# Allegro board CY8CKIT-038_Layout.brd
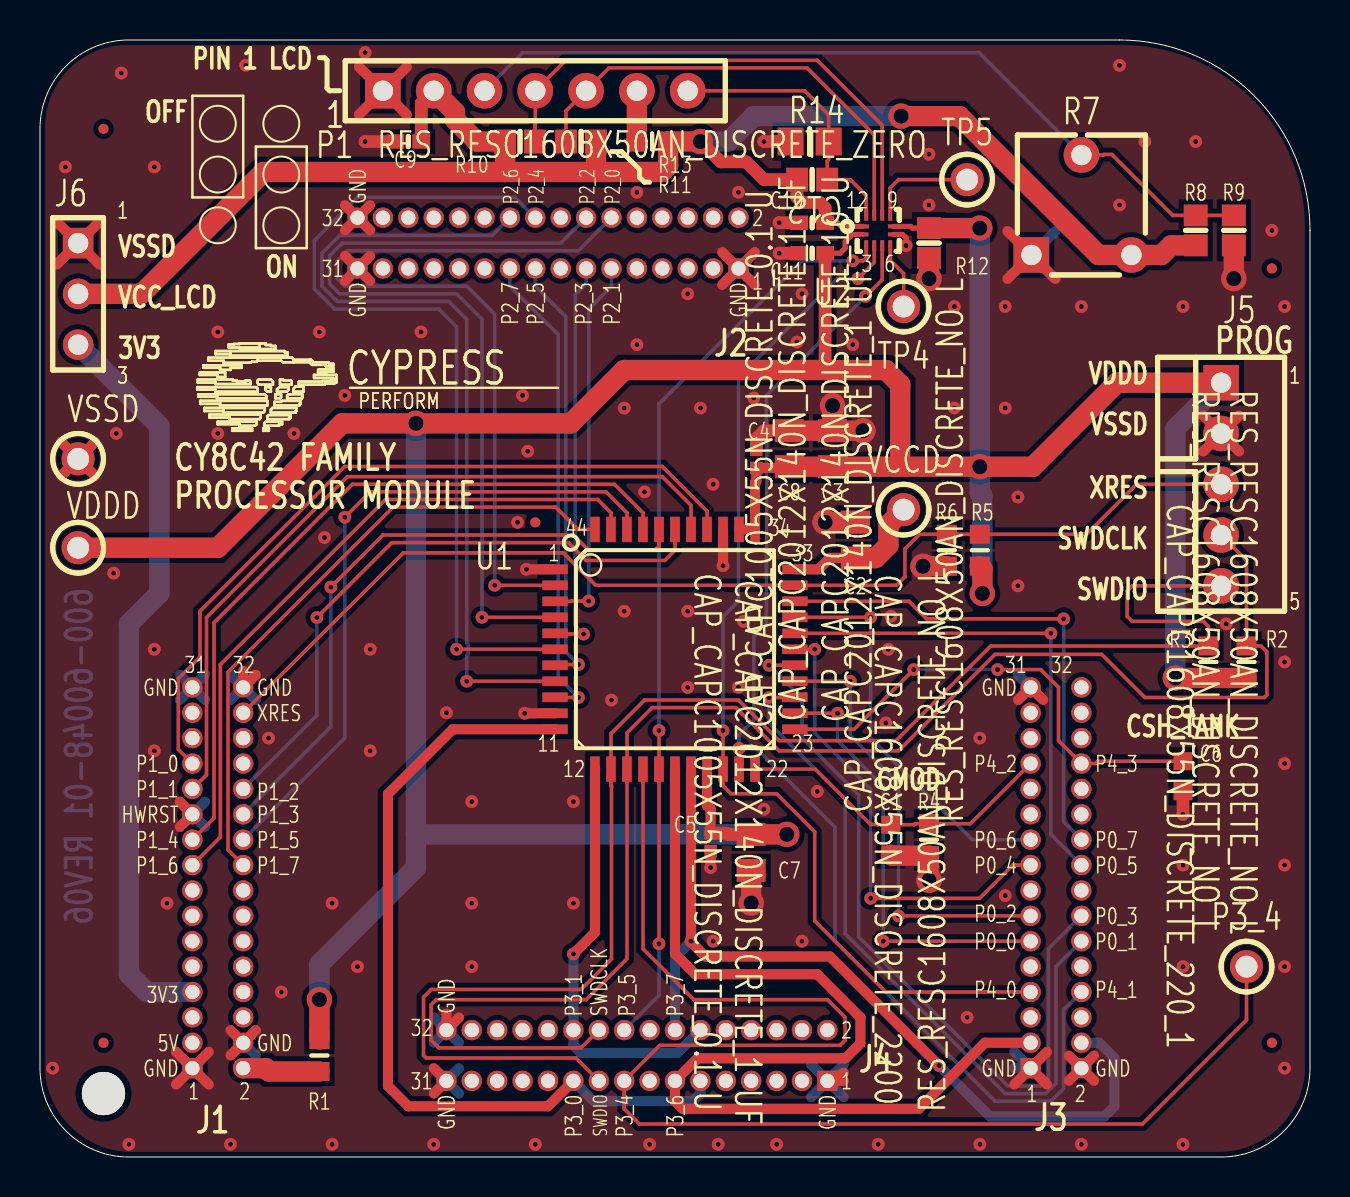
[diagram p0: board, top side]
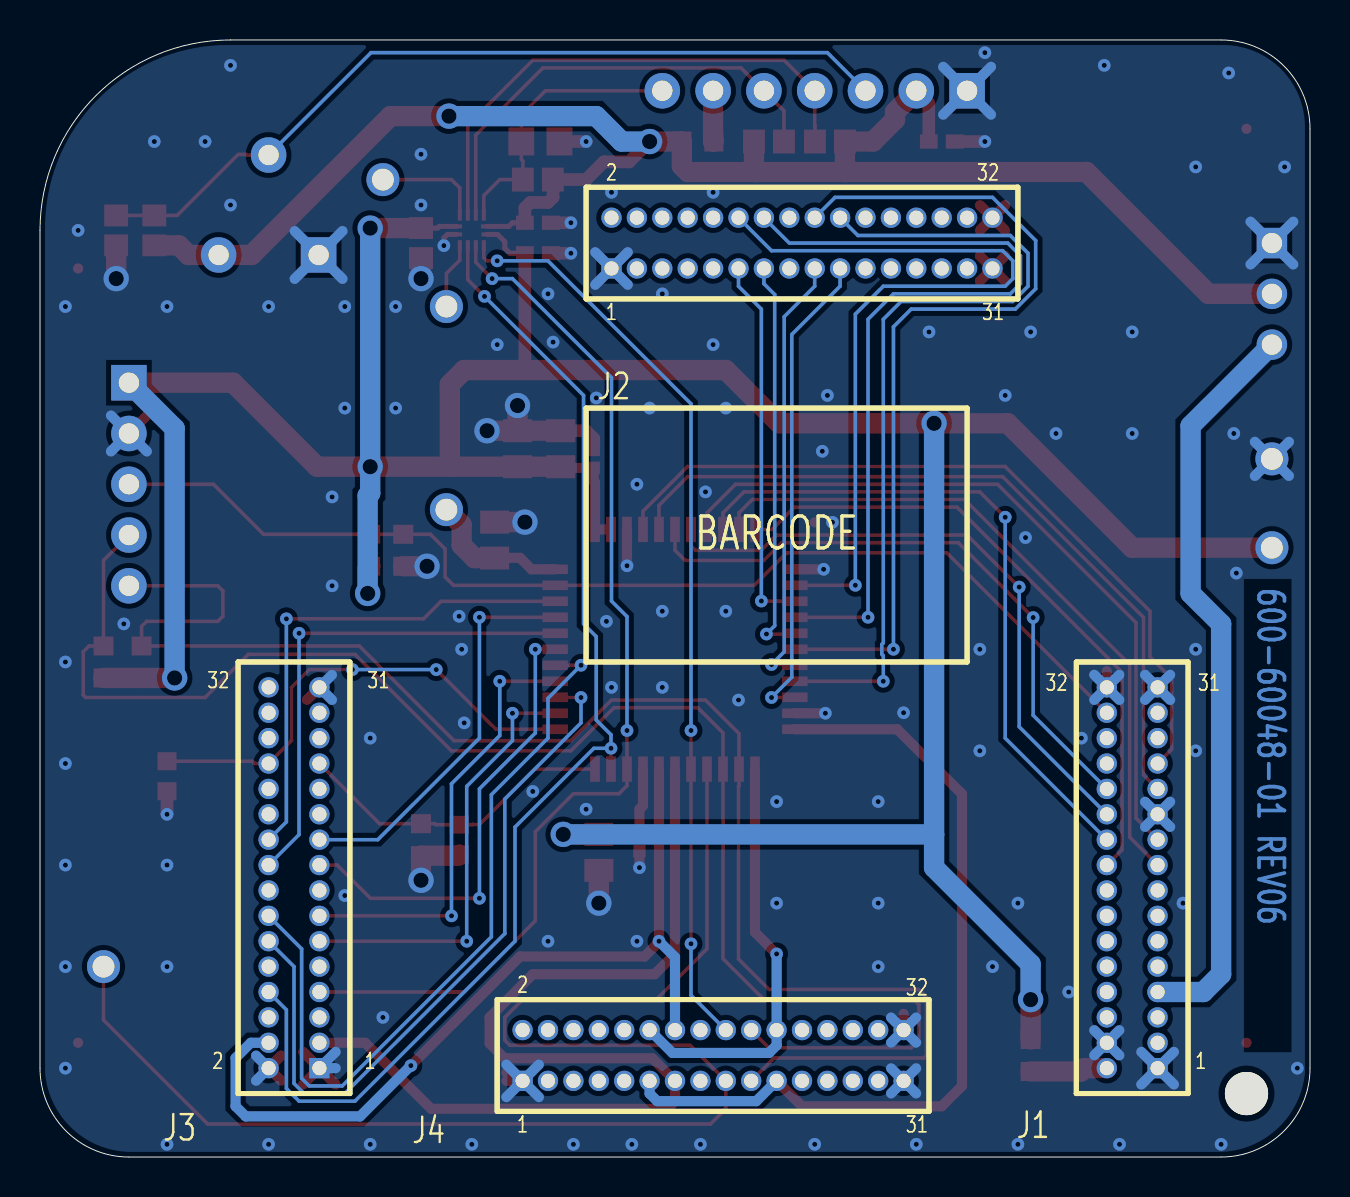
[diagram p1: board, bottom side, seen from below]

Outline 63.5 x 55.88 mm; copper layers: TOP, BOTTOM. Coordinates in mm from the lower left corner of the outline.

## Placement (name value [footprint] x y rotation side)
C1  2200 pF  [CAPC1608X55N]  42.54 15.88 270 top
C2  1 uF  [CAPC2012X140N]  40.77 30.86 90 top
C3  10 uF  [CAPC2012X140N]  39.62 35.43 90 top
C4  0.1 uF  [CAPC1005X55N]  35.81 34.92 90 top
C5  0.1 uF  [CAPC1005X55N]  33.53 15.75 270 top
C6  2200 pF  [CAPC1608X55N]  57.15 19.05 270 top
C7  1 uF  [CAPC2012X140N]  35.56 15.24 270 top
C8  1 uF  [CAPC2012X140N]  37.46 35.43 90 top
C9  0.1 uFd  [C-CC0402]  18.41 50.8 0 top
C10  0.1 uFd  [C-CC0402]  38.61 46.74 180 top
C11  0.1 uFd  [C-CC0402]  38.61 45.21 180 top
C12  22 uFd  [C-CC0603]  38.61 48.89 180 top
J1  Header 2x16  [HDR16X2-0P05]  8.89 13.97 270 bottom
J2  Header 2x16  [HDR16X2-0P05]  25.4 45.72 0 bottom
J3  Header 2x16  [HDR16X2-0P05]  50.8 13.97 270 bottom
J4  Header 2x16  [HDR16X2-0P05]  29.85 5.08 0 bottom
J5  HDR 1x5  [HDR5_KEYED_M]  59.05 28.57 90 top
J6  3 PIN HDR  [HDR3]  1.9 45.72 180 top
NOREF  -  []  236.77 23.18 0 top
NOREF#2  -  [unnamed#2]  3.17 3.17 0 top
NOREF#3  -  [unnamed#2]  24.77 31.75 0 top
NOREF#4  -  []  -128.65 -282.19 0 top
NOREF#5  -  []  3.17 3.17 0 top
NOREF#6  -  [unnamed#2]  61.59 44.45 0 top
NOREF#7  -  []  3.17 3.17 0 top
NOREF#8  -  []  0 4.45 0 top
NOREF#9  -  [unnamed#2]  61.59 5.71 0 top
NOREF#10  -  []  63.5 4.45 0 top
NOREF#11  -  []  303.15 -205.99 0 top
NOREF#12  -  [unnamed#2]  3.17 5.71 0 top
NOREF#13  -  []  4.45 0 0 top
NOREF#14  -  []  61.24 0.58 0 top
NOREF#15  -  []  10.79 36.2 0 top
NOREF#16  -  [unnamed#2]  3.17 51.43 0 top
NOREF#17  -  []  24.77 53.34 0 top
NOREF#18  -  []  4.45 55.88 0 top
NOREF#19  -  []  61.18 52.59 0 top
NOREF#20  -  []  303.15 -205.99 0 top
NOREF#21  -  []  -1.65 -205.99 180 bottom
NOREF#22  -  []  26.67 31.12 180 bottom
P1  LCD HEADER W/O BACKLIGHT  [LCD_SD1602X_CONN]  24.77 53.34 0 top
P3_4  RED  [TP_43_65]  60.32 9.52 0 top
R1  ZERO  [RESC1608X50AN]  13.97 5.08 90 top
R2  NO LOAD  [RESC1608X50AN]  60.32 24.77 270 top
R3  NO LOAD  [RESC1608X50AN]  58.42 24.77 270 top
R4  NO LOAD  [RESC1608X50AN]  44.45 15.88 90 top
R5  NO LOAD  [RESC1608X50AN]  46.99 30.35 270 top
R6  NO LOAD  [RESC1608X50AN]  45.34 30.35 90 top
R7  10K  [EVN-D8AA03B14]  52.07 47.62 0 top
R8  2.7K  [R-CR0603]  57.78 46.35 90 top
R9  7.15K  [R-CR0603]  59.69 46.35 270 top
R10  4.7K  [R-CR0603]  24 50.8 180 top
R11  4.7K  [R-CR0603]  27.05 50.8 0 top
R12  10K  [R-CR0603]  44.45 45.72 270 top
R13  ZERO  [RESC1608X50AN]  30.61 50.8 0 top
R14  10K  [R-CR0805]  38.48 50.8 0 top
TP4  RED  [TP_43_65]  43.18 42.54 0 top
TP5  RED  [TP_43_65]  46.35 48.89 0 top
U1  PSoC4A_44_TQFP  [TQFP44]  31.75 25.4 0 top
U2  FXMAR2104  [UMLP-12_2P10X2P10MM]  41.91 46.35 0 top
VCCD  RED  [TP_43_65]  43.18 32.38 0 top
VDDD  RED  [TP_43_65]  1.9 30.48 0 top
VSSD  BLACK  [TP_43_65]  1.9 34.92 0 top

## Library data of the parts
C1 = CAP: room: USB
C2 = CAP: alternate symbols: (CAPC2012X140N,CAPC2012X140L,CAPC2012X140M); room: USB
C3 C6-C8 = CAP: alternate symbols: (CAPC2012X140N,CAPC2012X140L,CAPC2012X140M)
C4 C5 = CAP: alternate symbols: (CAPC1005X55N,CAPC1005X55L,CAPC1005X55M)
C9-C11 = 0.1 uFd 0402: alternate symbols: (C-CC0402_A)
C12 = 1000 pFd 0603 NPO_0
J1 = HDR_2x16_SHRD: alternate symbols: (HDR16X2-0P05); room: USB
J2-J4 = HDR_2x16_SHRD: alternate symbols: (HDR16X2-0P05)
J5 = HDR 1x5 Keyed 0.1_M
J6 = 3 PIN Header GOLD_0
P1 = RCP LCD 16x1 _1.100 TH
P3_4 TP4 TP5 VCCD VDDD VSSD = TEST_POINT
R1 R13 = RES: alternate symbols: (RESC1608X50AN,RESC1608X50AL,RESC1608X50AM)
R2 R4 R5 = RES
R3 R6 = RES: room: USB
R7 = Pot 10K single turn 3352T
R8 = 2_0.4K ohm 5% 0603: alternate symbols: (R-CR0603_A)
R9 = 680 ohm 5% 0603_0: alternate symbols: (R-CR0603_A)
R10 R11 = 6_0.04K ohm 1% 0603: alternate symbols: (R-CR0603_A)
R12 = 10K ohm 5% 0603_0: alternate symbols: (R-CR0603_A)
R14 = 330 ohm 5% 0805_1
U1 = PSOC4A_44_TQFP_4: alternate symbols: (tqfpa100); room: USB
U2 = PSOC4A_44_TQFP_6: alternate symbols: (tqfpa100)

## Footprints (pads in the part's own frame, mm; a bottom-side part is the same pattern mirrored in y, then rotated)
C-CC0402
  rect 0.889x0.711 smd: 1(-0.648,0) 2(0.648,0)
C-CC0603
  rect 1.092x1.194 smd: 1(-0.749,0) 2(0.749,0)
CAPC1005X55N
  rect 0.62x0.62 smd: 1(-0.45,0) 2(0.45,0)
CAPC1608X55N
  rect 0.9x0.95 smd: 1(-0.75,0) 2(0.75,0)
CAPC2012X140N
  rect 1.15x1.45 smd: 1(-0.9,0) 2(0.9,0)
EVN-D8AA03B14
  rect 1.778x1.778 hole 1.016: 1(-2.5,-2.5)
  round 1.778 hole 1.016: 2(0,2.5) 3(2.5,-2.5)
HDR3
  rect 1.524x1.524 hole 1.016: 1(0,0)
  round 1.524 hole 1.016: 2(0,2.54) 3(0,5.08)
HDR5_KEYED_M
  rect 1.778x1.778 hole 1.016: 1(10.16,0)
  round 1.778 hole 1.016: 2(7.62,0) 3(5.08,0) 4(2.54,0) 5(0,0)
HDR16X2-0P05
  rect 1.016x1.016 hole 0.711: 1(9.525,1.27)
  round 1.016 hole 0.711: 2(9.525,-1.27) 3(8.255,1.27) 4(8.255,-1.27) 5(6.985,1.27) 6(6.985,-1.27) 7(5.715,1.27) 8(5.715,-1.27) 9(4.445,1.27) 10(4.445,-1.27) 11(3.175,1.27) 12(3.175,-1.27) 13(1.905,1.27) 14(1.905,-1.27) 15(0.635,1.27) 16(0.635,-1.27) 17(-0.635,1.27) 18(-0.635,-1.27) 19(-1.905,1.27) 20(-1.905,-1.27) 21(-3.175,1.27) 22(-3.175,-1.27) 23(-4.445,1.27) 24(-4.445,-1.27) 25(-5.715,1.27) 26(-5.715,-1.27) 27(-6.985,1.27) 28(-6.985,-1.27) 29(-8.255,1.27) 30(-8.255,-1.27) 31(-9.525,1.27) 32(-9.525,-1.27)
LCD_SD1602X_CONN
  rect 1.778x1.778 hole 1.016: 1(-7.62,0)
  round 1.778 hole 1.016: 2(-5.08,0) 3(-2.54,0) 4(0,0) 5(2.54,0) 6(5.08,0) 7(7.62,0)
R-CR0603
  rect 1.092x1.194 smd: 1(-0.749,0) 2(0.749,0)
R-CR0805
  rect 1.295x1.397 smd: 1(-0.953,0) 2(0.953,0)
RESC1608X50AN
  rect 0.95x1 smd: 1(-0.8,0) 2(0.8,0)
TP_43_65
  round 1.651 hole 1.092: 1(0,0)
TQFP44
  rect 1.27x0.483 smd: 1(-5.994,4) 2(-5.994,3.2) 3(-5.994,2.4) 4(-5.994,1.6) 5(-5.994,0.8) 6(-5.994,0) 7(-5.994,-0.8) 8(-5.994,-1.6) 9(-5.994,-2.4) 10(-5.994,-3.2) 11(-5.994,-4) 23(5.994,-4) 24(5.994,-3.2) 25(5.994,-2.4) 26(5.994,-1.6) 27(5.994,-0.8) 28(5.994,0) 29(5.994,0.8) 30(5.994,1.6) 31(5.994,2.4) 32(5.994,3.2) 33(5.994,4)
  rect 0.483x1.27 smd: 12(-4,-5.994) 13(-3.2,-5.994) 14(-2.4,-5.994) 15(-1.6,-5.994) 16(-0.8,-5.994) 17(0,-5.994) 18(0.8,-5.994) 19(1.6,-5.994) 20(2.4,-5.994) 21(3.2,-5.994) 22(4,-5.994) 34(4,5.994) 35(3.2,5.994) 36(2.4,5.994) 37(1.6,5.994) 38(0.8,5.994) 39(0,5.994) 40(-0.8,5.994) 41(-1.6,5.994) 42(-2.4,5.994) 43(-3.2,5.994) 44(-4,5.994)
UMLP-12_2P10X2P10MM
  rect 0.588x0.2 smd: 1(-0.756,0.2)
  rect 0.563x0.2 smd: 2(-0.769,-0.2) 7(0.769,-0.2) 8(0.769,0.2)
  rect 0.2x0.563 smd: 3(-0.6,-0.769) 4(-0.2,-0.769) 5(0.2,-0.769) 6(0.6,-0.769) 9(0.6,0.769) 10(0.2,0.769) 11(-0.2,0.769) 12(-0.6,0.769)
unnamed#2
  round 2.159 hole 2.286 unplated: (0,0)

## Nets
3V3: J1.7 J6.3
5V: J1.3
GND_SIGNAL: C1.2 C2.2 C3.2 C4.2 C5.2 C6.2 C7.2 C8.2 C9.1 C10.2 C11.2 J1.1 J1.4 J1.21 J1.31 J1.32 J2.1 J2.31 J2.32 J3.1 J3.2 J3.31 J4.1 J4.31 J4.32 J5.2 J6.1 P1.1(GND) R4.1 R6.1 R7.1 R9.2 R12.2 R14.1 U1.1(VSS#1) U1.10(VSS#10) U1.36(VSSA) U2.7(GND) VSSD.1
VCC_LCD: C9.2 C10.1 C12.2 J6.2 P1.2(VCC) R7.3 R8.1 R10.2 R11.2 R13.2 U2.1(VCCB)
VCCD: C2.1 U1.33(VCCD) VCCD.1
VDDD: C3.1 C4.1 C5.1 C7.1 C8.1 C11.1 J5.1 R1.2 R2.2 R3.2 R5.2 R12.1 U1.19(VDDD#19) U1.34(VDDD#34) U1.35(VDDA) U2.2(VCCA) U2.8(OE) VDDD.1
P0_0: J3.11 U1.24(P0_0)
P0_1: J3.12 U1.25(P0_1)
P0_2: J3.13 U1.26(P0_2)
P0_3: J3.14 U1.27(P0_3)
P0_4: J3.17 U1.28(P0_4)
P0_5: J3.18 U1.29(P0_5)
P0_6: J3.19 U1.30(P0_6)
P0_7: J3.20 U1.31(P0_7)
P1_0: J1.25 U1.37(P1_0)
P1_1: J1.23 U1.38(P1_1)
P1_2: J1.24 U1.39(P1_2)
P1_3: J1.22 U1.40(P1_3)
P1_4: J1.19 U1.41(P1_4)
P1_5: J1.20 U1.42(P1_5)
P1_6: J1.17 U1.43(P1_6)
P1_7: J1.18 U1.44(P1_7)
P2_0: J2.12 U1.2(P2_0)
P2_1: J2.11 U1.3(P2_1)
P2_2: J2.14 U1.4(P2_2)
P2_3: J2.13 U1.5(P2_3)
P2_4: J2.18 U1.6(P2_4)
P2_5: J2.17 U1.7(P2_5)
P2_6: J2.20 U1.8(P2_6)
P2_7: J2.19 U1.9(P2_7)
P3_0: J4.11 J4.21 U1.11(P3_0)
P3_1: J4.12 J4.22 U1.12(P3_1)
P3_4: J4.17 P3_4.1 U1.15(P3_4)
P3_5: J4.18 U1.16(P3_5) U2.3(A0)
P3_5_OUT: C12.1 P1.7(RES) R14.2 U2.12(B0)
P3_6: J3.3 J4.13 U1.17(P3_6)
P3_7: J3.4 J4.14 U1.18(P3_7)
P4_0: J3.7 U1.20(P4_0) U2.4(A1)
P4_0_OUT: P1.5(SCL) R11.1 U2.11(B1)
P4_1: J3.8 U1.21(P4_1) U2.5(A2)
P4_1_OUT: P1.4(SDA) R10.1 U2.10(B2)
P4_2: C1.1 J3.25 R4.2 U1.22(P4_2)
P4_3: C6.1 J3.26 U1.23(P4_3)
SWDCLK: J4.20 J5.4 R2.1 U1.14(P3_3_SWDCLK)
SWDIO: J4.19 J5.5 R3.1 U1.13(P3_2_SWDIO)
XRES: J1.30 J5.3 R5.1 R6.2 U1.32(X\R\E\S\)
N17003631: J1.2 R1.1
N18418655: P1.3(VO) R7.2(WIPER) R8.2 R9.1
N18571446: TP5.1 U2.9(B3)
N18578153: TP4.1 U2.6(A3)
N18580871: P1.6(A) R13.1

Pads without a net: J1 5 6 8 9 10 11 12 13 14 15 16 26 27 28 29; J2 2 3 4 5 6 7 8 9 10 15 16 21 22 23 24 25 26 27 28 29 30; J3 5 6 9 10 15 16 21 22 23 24 27 28 29 30 32; J4 2 3 4 5 6 7 8 9 10 15 16 23 24 25 26 27 28 29 30

## Via types
v1: diameter 1.27, hole 0.762, TOP to BOTTOM, 17 vias
v2: diameter 0.635, hole 0.254, TOP to BOTTOM, 141 vias

## Routing (per net, layer and track width the routed paths; a pad name or vN(x,y) marks a point on that pad's centre or on a via; arc(x,y) is an arc through that point)
3V3: length 37.4
  BOTTOM w1.016: J1.7 5.33,8.25 4.45,9.14 4.45,26.67 5.97,28.19 5.97,36.58 J6.3
GND_SIGNAL: length 163
  TOP w0.254: U2.7 43.13,46.16 43.31,45.97 v2(43.31,45.59)
  TOP w0.508: 6.99,17.77 J1.21 6.99,16.52 ; 10.16,24.31 J1.32 10.79,24.12 ; 1.05,34.07 VSSD.1 ; VSSD.1 2.76,35.78 ; VSSD.1 2.76,34.07 ; VSSD.1 1.05,35.78 ; 15.25,45.08 J2.31 ; J2.31 16.5,43.82 ; J2.31 16.5,45.08 ; J2.31 15.25,43.82 ; 6.81,3.63 J1.1 ; J1.1 8.43,5.26 ; J1.1 8.43,3.63 ; J1.1 6.81,5.26 ; 48.38,46.32 R7.1 ; R7.1 50.76,43.93 ; R7.1 48.38,43.93 ; 15.25,47.62 J2.32 ; J2.32 16.5,47.62 ; J2.32 15.25,46.36 ; J2.32 16.5,46.36 ; 40.18,3.81 J4.1 40.18,4.22 ; 34.11,45.26 J2.1 ; J2.1 34.11,43.64 ; J2.1 35.74,45.26 ; J2.1 35.74,43.64 ; 9.53,5.09 10.16,5.71 ; 10.16,5.71 10.79,6.34 ; 10.16,5.71 9.53,6.34 ; J3.1 50.34,5.26 ; J3.1 50.34,3.63 ; J3.1 48.72,3.63 ; 20.95,6.98 20.32,6.35 20.32,7.16 ; 0.84,44.65 J6.1 ; J6.1 2.97,46.79 ; J6.1 0.84,46.79 ; J6.1 2.97,44.65 ; 58.16,35.3 J5.2 ; J5.2 59.95,37.09 ; J5.2 58.16,37.09 ; J5.2 59.95,35.3 ; 51.44,3.82 J3.2 ; J3.2 51.44,5.07 ; J3.2 52.7,5.07 ; J3.2 52.7,3.82 ; 19.69,3.18 20.32,3.81 19.69,4.44 ; 50.16,22.87 J3.31 48.9,22.87 ; U1.10 v2(24.23,22.2) ; P1.1 18.34,54.53 ; P1.1 18.34,52.15 ; P1.1 15.95,54.53 ; P1.1 15.95,52.15 ; U1.1 v2(24.32,29.4) ; U1.36 v2(34.15,29.58) ; C5.2 v2(33.53,14.48)
  TOP w0.635: C8.2 36.21,36.33 35.81,35.94 C4.2 ; C6.2 v2(57.15,17.14) ; C10.2 v2(36.96,46.74) ; C9.1 v2(16.26,50.8) ; R14.1 v2(36.2,50.8) ; C11.2 v2(36.96,45.21)
  TOP w1.016: C1.2 42.6,15.07 R4.1 v1(44.45,13.84) ; C7.2 v1(35.56,12.7) ; R6.1 v1(44.15,29.55) ; R12.2 v1(44.45,43.94) ; C2.2 v1(39.25,31.76) ; R9.2 v1(59.69,43.94) ; C3.2 C8.2 ; C3.2 v1(41.15,36.33) ; C3.2 v1(39.62,37.59)
  BOTTOM w0.508: 9.53,24.12 J1.32 ; J1.32 9.53,22.87 ; J1.32 10.79,22.87 ; J1.32 10.79,24.12 ; 48.72,5.26 J3.1 48.72,4.45 ; 58.16,35.3 J5.2 ; J5.2 59.95,35.3 ; J5.2 59.95,37.09 ; 48.9,22.87 J3.31 48.9,24.12 ; 19.69,5.72 20.32,6.35 ; 20.32,6.35 20.95,6.98 ; 20.32,6.35 19.69,6.98 ; 20.32,6.35 20.95,5.72 ; J1.31 8.25,22.87 ; J1.31 6.99,24.12 ; J1.31 6.99,22.87 ; J1.31 8.25,24.12 ; VSSD.1 2.76,34.07 ; VSSD.1 2.76,35.78 ; VSSD.1 1.05,34.07 ; VSSD.1 1.05,35.78 ; 20.32,3.81 20.95,3.18 ; 20.32,3.81 19.69,4.44 ; 20.32,3.81 20.95,4.44 ; 20.32,3.81 19.69,3.18 ; J6.1 2.97,46.79 ; J6.1 2.97,44.65 ; J6.1 0.84,44.65 ; J6.1 0.84,46.79 ; J4.1 40.18,4.62 ; J4.1 38.56,4.62 ; J4.1 38.56,3 ; J4.1 40.18,3 ; 6.81,5.26 J1.1 ; J1.1 8.43,5.26 ; J1.1 6.81,3.63 ; J1.1 8.43,3.63 ; J2.1 35.74,43.64 ; J2.1 35.74,45.26 ; J2.1 34.11,43.64 ; J2.1 34.11,45.26 ; J1.21 8.25,16.52 ; J1.21 6.99,16.52 ; J1.21 8.25,17.77 ; J1.21 6.99,17.77 ; R7.1 50.76,46.32 ; R7.1 48.38,43.93 ; R7.1 48.38,46.32 ; R7.1 50.76,43.93 ; 10.16,5.71 10.79,6.34 ; 10.16,5.71 9.53,5.09 ; 10.16,5.71 9.53,6.34 ; 10.16,5.71 10.79,5.09 ; 15.95,52.15 P1.1 ; P1.1 18.34,52.15 ; P1.1 15.95,54.53 ; P1.1 18.34,54.53 ; 52.7,5.07 J3.2 52.7,3.82
  vias: v2(0.63,4.45) v2(1.27,49.53) v2(3.68,29.21) v2(3.81,36.2) v2(4.06,54.23) v2(4.45,0.63) v2(5.71,49.53) v2(5.71,25.4) v2(5.71,20.32) v2(6.35,12.7) v2(8.89,41.27) v2(8.89,36.2) v2(9.52,0.63) v2(10.29,54.61) v2(11.43,20.96) v2(12.07,8.25) v2(12.7,36.2) v2(13.97,41.27) v2(14.22,30.99) v2(14.61,12.7) v2(14.61,0.63) v2(15.24,38.1) v2(15.88,9.52) v2(16.26,55.24) v2(16.51,25.4) v2(16.51,20.32) v2(19.05,41.27) v2(19.69,0.63) v2(20.32,22.23) v2(21.59,17.78) v2(21.59,12.7) v2(21.59,9.52) v2(23.88,31.75) v2(24.13,38.1) v2(24.38,35.31) v2(24.77,0.63) v2(26.67,17.78) v2(26.67,12.7) v2(28.57,22.86) v2(29.21,37.46) v2(29.21,27.3) v2(29.85,48.26) v2(29.85,40.64) v2(30.23,33.27) v2(30.48,0.63) v2(32.38,43.18) v2(32.38,27.3) v2(32.38,23.5) v2(33.02,37.46) v2(33.66,33.66) v2(33.66,10.79) v2(33.91,0.63) v2(34.92,48.26) v2(34.92,23.5) v2(35.18,26.8) v2(35.69,37.97) v2(36.2,17.4) v2(36.83,0.63) v2(37.85,40.77) v2(38.1,43.18) v2(38.1,10.79) v2(38.86,18.29) v2(40.64,40.64) v2(41.91,0.63) v2(42.29,21.72) v2(42.42,25.4) v2(42.54,27.05) v2(44.45,50.16) v2(44.45,47.62) v2(45.72,42.54) v2(45.72,37.46) v2(46.35,6.98) v2(46.99,20.96) v2(46.99,0.63) v2(48.26,42.54) v2(48.26,37.46) v2(48.26,13.08) v2(48.89,33.02) v2(48.89,28.57) v2(52.07,42.54) v2(52.07,0.63) v2(53.97,54.61) v2(53.97,47.62) v2(55.24,50.8) v2(57.15,42.54) v2(57.15,14.61) v2(57.15,9.52) v2(57.15,0.63) v2(57.78,50.8) v2(59.31,26.67) v2(61.59,46.35) v2(62.23,42.54) v2(62.23,24.77) v2(62.23,19.69) v2(62.23,14.61) v2(62.23,9.52) v2(62.23,4.45)
VCC_LCD: length 85
  TOP w0.254: U2.1 40.06,46.55 39.88,46.74 C10.1
  TOP w0.635: v1(33.02,50.8) 34.04,49.78 35.31,49.78 36.2,48.89 C12.2 37.85,48.88 37.85,48.01 38.1,47.75 38.98,47.75 39.26,47.48 C10.1 ; P1.2 19.06,52.72 C9.2
  TOP w1.016: 23.24,49.28 11.18,49.28 5.08,43.18 J6.2 ; 23.24,49.28 27.69,49.28 ; 23.24,49.28 23.25,49.29 R10.2 21.84,50.8 20.75,51.89 20.75,52.28 P1.2 ; v1(33.02,50.8) R13.2 31.41,49.58 31.1,49.28 27.69,49.28 ; 27.69,49.28 27.8,49.39 R11.2 ; R8.1 56.56,45.61 56.08,45.12 R7.3 52.92,45.12 45.97,52.07 v1(43.05,52.07)
  BOTTOM w1.016: v1(33.02,50.8) 34.42,50.8 35.69,52.07 v1(43.05,52.07)
VCCD: length 7.3
  TOP w0.508: C2.1 40.76,29.97 39.5,29.97 38.93,29.4 U1.33
  TOP w1.016: C2.1 41.77,29.96 42.42,30.61 42.42,31.62 VCCD.1
VDDD: length 188.3
  TOP w0.254: U2.2 40.62,46.16 40.26,45.79 40.26,45.47 40,45.21 C11.1 ; R12.1 43.62,46.47 43.53,46.55 U2.8
  TOP w0.508: C8.1 37.41,34.47 C4.1 35.81,33.8 35.75,33.74 U1.34 U1.35 ; C5.1 33.53,17.4 33.35,17.58 U1.19
  TOP w0.635: C11.1 39.26,39.48 39.37,39.37 ; C5.1 34.35,16.2 34.41,16.14 C7.1
  TOP w1.016: R2.2 R3.2 v1(56.77,23.96) ; J5.1 53.85,38.73 49.65,34.53 v1(46.99,34.53) 42.93,34.53 ; R5.2 47.12,29.43 v1(47.12,28.19) ; 42.93,34.53 43.01,34.62 43.01,38.65 42.29,39.37 29.21,39.37 26.54,36.7 v1(18.8,36.7) 15.11,36.7 8.89,30.48 VDDD.1 ; 42.93,34.53 C3.1 C8.1 ; R12.1 v1(46.99,46.47) ; R1.2 v1(13.97,7.87) ; C7.1 v1(37.34,16.14)
  BOTTOM w1.016: v1(13.97,7.87) 13.97,9.65 18.8,14.48 18.8,16.13 ; v1(37.34,16.14) 18.81,16.14 18.8,16.13 ; v1(46.99,46.47) v1(46.99,34.53) 46.99,33.21 47.12,33.09 v1(47.12,28.19) ; 18.8,16.13 v1(18.8,36.7) ; v1(56.77,23.96) 56.77,36.45 J5.1
P0_0: length 21.9
  TOP w0.178: v2(42.16,10.79) J3.11 ; U1.24 v2(39.88,22.2)
  BOTTOM w0.178: v2(39.88,22.2) 39.88,20.83 42.16,18.54 v2(42.16,10.79)
P0_1: length 36.4
  TOP w0.178: v2(36.45,22.99) 37.73,22.99 U1.25
  BOTTOM w0.178: J3.12 50.8,9.52 50.8,3.68 50.29,3.17 48.26,3.17 40.26,11.18 40.26,17.91 36.45,21.72 v2(36.45,22.99)
P0_2: length 22.1
  TOP w0.178: v2(40.51,23.8) U1.26 ; v2(42.93,12.07) J3.13
  BOTTOM w0.178: v2(40.51,23.8) 40.51,21.08 42.93,18.67 v2(42.93,12.07)
P0_3: length 38.3
  TOP w0.178: v2(36.45,24.6) U1.27
  BOTTOM w0.178: v2(36.45,24.6) 38.1,22.95 38.1,20.96 40.93,18.12 40.93,11.01 48.39,3.56 50.04,3.56 50.42,3.94 50.42,10.41 J3.14
P0_4: length 23.3
  TOP w0.178: U1.28 v2(38.73,25.4) ; v2(41.53,12.94) 46.98,12.94 48.64,14.61 J3.17
  BOTTOM w0.178: v2(38.73,25.4) 38.73,21.21 41.53,18.41 v2(41.53,12.94)
P0_5: length 25
  TOP w0.178: v2(50.55,26.2) U1.29
  BOTTOM w0.178: v2(50.55,26.2) 50.55,16.13 J3.18
P0_6: length 19.9
  TOP w0.178: v2(41.53,27) U1.30
  BOTTOM w0.178: J3.19 46.61,15.88 41.53,20.96 v2(41.53,27)
P0_7: length 25.2
  TOP w0.178: U1.31 43.45,27.8 44.32,26.92 v2(51.18,26.92)
  BOTTOM w0.178: J3.20 51.18,16.76 v2(51.18,26.92)
P1_0: length 38.5
  TOP w0.178: U1.37 33.35,32.31 31.12,34.54 15.24,34.54 8,27.3 8,25.02 6.92,23.93 6.92,20.39 J1.25
P1_1: length 37.8
  TOP w0.178: U1.38 32.55,32.6 31.12,34.04 15.37,34.04 8.32,26.99 8.32,19.12 J1.23
P1_2: length 31.2
  TOP w0.178: U1.39 31.75,30.35 31.24,29.85 27.3,29.85 26.42,30.73 17.59,30.73 15.13,28.27 15.13,28.27 14.78,27.93 v2(13.84,26.99)
  BOTTOM w0.178: v2(13.84,26.99) 13.84,22.1 J1.24
P1_3: length 31.9
  TOP w0.178: U1.40 30.95,30.56 30.74,30.35 27.43,30.35 26.67,31.12 17.14,31.12 v2(14.54,28.51)
  BOTTOM w0.178: J1.22 14.54,21.53 v2(14.54,28.51)
P1_4: length 37
  TOP w0.178: J1.19 8.7,16.95 8.7,26.73 15.62,33.66 28.72,33.66 30.15,32.23 U1.41
P1_5: length 34.1
  TOP w0.178: v2(15.24,32) 16.51,33.27 28.3,33.27 29.35,32.23 U1.42
  BOTTOM w0.178: J1.20 15.24,20.96 v2(15.24,32)
P1_6: length 34.7
  TOP w0.178: J1.17 9.02,16 9.02,24.64 17.27,32.89 27.88,32.89 28.55,32.23 U1.43
P1_7: length 32.2
  TOP w0.178: J1.18 9.4,15.37 9.4,24.26 17.65,32.51 25.78,32.51 26.9,31.39 U1.44
P2_0: length 40.7
  TOP w0.178: v2(22.73,28.6) U1.2
  BOTTOM w0.178: J2.12 26.92,45.34 15.37,45.34 14.86,44.83 14.86,43.94 15.24,43.56 21.34,43.56 22.73,42.16 v2(22.73,28.6)
P2_1: length 18.8
  TOP w0.178: U1.3 26.59,27.8 26.6,27.81 v2(27.43,27.81)
  BOTTOM w0.178: J2.11 28.57,43.56 27.43,42.42 v2(27.43,27.81)
P2_2: length 41.9
  TOP w0.178: v2(22.1,27) U1.4
  BOTTOM w0.178: v2(22.1,27) 22.1,41.91 20.83,43.18 14.99,43.18 14.48,43.69 14.48,45.08 15.11,45.72 26.04,45.72 J2.14
P2_3: length 20.1
  TOP w0.178: v2(27.18,26.16) 25.79,26.16 U1.5
  BOTTOM w0.178: v2(27.18,26.16) 26.76,26.58 26.76,43.15 27.3,43.69 J2.13
P2_4: length 43.7
  TOP w0.178: v2(20.83,25.4) U1.6
  BOTTOM w0.178: v2(20.83,25.4) 20.83,41.53 19.94,42.42 14.73,42.42 13.72,43.43 13.72,45.85 15.88,48.01 23.75,48.01 J2.18
P2_5: length 21.9
  TOP w0.178: v2(26.92,24.64) 25.79,24.64 U1.7
  BOTTOM w0.178: J2.17 24.77,43.56 26.29,42.04 26.29,25.27 v2(26.92,24.64)
P2_6: length 42.3
  TOP w0.178: v2(21.34,23.8) U1.8
  BOTTOM w0.178: v2(21.34,23.8) 21.34,25.08 21.41,25.16 21.41,25.64 21.34,25.72 21.34,41.91 20.45,42.8 14.86,42.8 14.1,43.56 14.1,45.21 14.99,46.1 22.61,46.1 J2.20
P2_7: length 24.1
  TOP w0.178: U1.9 25.77,22.99 v2(26.92,22.99)
  BOTTOM w0.178: v2(26.92,22.99) 25.91,24 25.91,41.15 23.5,43.56 J2.19
P3_0: length 42.1
  TOP w0.508: U1.11 20.64,21.4 17.4,18.16 17.4,3.56 18.41,2.54 25.4,2.54 J4.21
  BOTTOM w0.508: 33.02,3.81 33.02,3.17 32.64,2.79 27.69,2.79 J4.21
P3_1: length 21.2
  TOP w0.508: v2(26.67,10.16) 27.75,11.24 U1.12
  BOTTOM w0.508: 33.02,6.35 31.88,5.21 27.05,5.21 26.67,5.59 J4.22 v2(26.67,10.16)
P3_4: length 71.2
  TOP w0.178: P3_4.1 60.32,6.86 55.12,1.65 29.97,1.65 29.21,2.41 J4.17 30.99,5.59 40,5.59 40.26,5.84 40.26,6.98 39.37,7.87 32.69,7.87 30.15,10.41 U1.15
P3_5: length 46
  TOP w0.178: U2.3 41.31,44.99 41.15,44.83 v2(40.64,44.83) ; v2(30.95,21.34) U1.16 v2(30.95,10.67)
  BOTTOM w0.178: v2(40.64,44.83) 38.1,44.83 30.95,37.68 v2(30.95,21.34) ; v2(30.95,10.67) 30.95,8.09 J4.18
P3_5_OUT: length 14.1
  TOP w0.178: P1.7 38.23,53.34 39.43,52.13 R14.2 39.43,49.9 39.36,49.83 C12.1 40.51,48.89 41.31,48.1 U2.12
P3_6: length 51.5
  TOP w0.508: J3.3 47.24,5.71 43.94,2.41 32.13,2.41 31.75,2.79 J4.13 32.88,4.94 40.27,4.94 41.02,5.69 41.02,6.98 38.86,9.14 32.77,9.14 31.75,10.16 U1.17
P3_7: length 42.8
  TOP w0.508: v2(44.96,4.57) 39.5,10.03 33.27,10.03 32.55,10.76 v2(32.55,10.79) U1.18
  BOTTOM w0.508: J3.4 52.96,5.71 53.72,4.95 53.72,2.54 53.21,2.03 47.5,2.03 v2(44.96,4.57) ; J4.14 31.75,9.99 v2(32.55,10.79)
P4_0: length 53
  TOP w0.178: v2(34.15,21.34) U1.20 34.15,18.57 34.55,18.17 36.83,18.17 38.73,16.27 38.73,11.81 42.29,8.25 J3.7 ; v2(40.89,43.94) 41.71,44.76 U2.4
  BOTTOM w0.178: v2(34.15,21.34) 34.15,27.04 34.92,27.81 34.92,38.99 39.88,43.94 v2(40.89,43.94)
P4_0_OUT: length 23.2
  TOP w0.178: U2.11 41.71,51.13 38.35,54.48 28.45,54.48 P1.5 26.3,52.34 R11.1
P4_1: length 61.5
  TOP w0.178: U2.5 42.11,43.89 v2(41.27,43.05) ; U1.21 v2(34.95,20.45)
  BOTTOM w0.178: J3.8 51.18,7.37 51.18,3.43 50.55,2.79 47.75,2.79 40.58,9.97 39.75,10.79 39.75,16.5 35.81,20.45 v2(34.95,20.45) 34.95,21.12 35.69,21.86 35.69,26.04 36.32,26.67 36.32,38.1 v2(41.27,43.05)
P4_1_OUT: length 26.4
  TOP w0.178: R10.1 24.75,51.59 24.77,51.61 P1.4 26.29,54.86 38.86,54.86 42.11,51.62 U2.10
P4_2: length 16.2
  TOP w0.178: J3.25 46.52,16.68 R4.2 43.75,16.68 43.7,16.63 C1.1 41.87,16.63 41.86,16.64 41.53,16.64 38.76,19.41 U1.22
P4_3: length 24.2
  TOP w0.178: v2(43.69,24.38) 40.7,21.4 U1.23 ; C6.1 52.89,19.8 52.78,19.69 J3.26 50.93,20.83 50.93,23.5 50.04,24.38 v2(47.88,24.38)
  BOTTOM w0.178: v2(43.69,24.38) v2(47.88,24.38)
SWDCLK: length 78.5
  TOP w0.178: J5.4 60.32,29.85 R2.1 61.05,25.57 61.34,25.27 61.34,23.11 61.21,22.99 55.24,22.99 53.09,25.15 47.75,25.15 42.93,20.32 36.96,20.32 34.8,22.48 30.61,22.48 29.35,21.22 U1.14 29.35,9.92 27.3,7.87 19.81,7.87 19.56,7.62 19.56,5.84 19.94,5.46 27.05,5.46 J4.20
SWDIO: length 78.4
  TOP w0.178: J4.19 26.8,4.95 19.3,4.95 19.18,5.08 19.18,8 19.56,8.38 27.05,8.38 28.57,9.91 28.57,18.55 28.55,18.57 U1.13 28.55,21.18 30.23,22.86 34.92,22.86 36.96,20.83 42.8,20.83 47.54,25.57 R3.1 58.42,26.54 58.17,26.8 54.61,26.8 54.36,27.05 54.36,28.32 54.61,28.57 J5.5
XRES: length 55.8
  TOP w0.178: J1.30 18.16,30.23 26.16,30.23 27.79,28.6 U1.32 42.82,28.6 43.25,29.02 43.25,30.42 43.98,31.15 R6.2 R5.1 52.32,31.15 54.83,33.66 J5.3
N17003631: length 3.9
  TOP w1.016: R1.1 11.45,4.28 11.28,4.45 10.16,4.45
N18418655: length 41.6
  TOP w0.178: R9.1 R8.2 56.64,47.1 53.59,50.15 53.18,50.15 53.16,50.13 R7.2
  BOTTOM w0.178: R7.2 46.95,55.24 24.13,55.24 P1.3
N18571446: length 5.4
  TOP w0.178: TP5.1 42.93,48.89 42.51,48.48 U2.9
N18578153: length 3.3
  TOP w0.178: TP4.1 43.18,44.2 42.51,44.87 U2.6
N18580871: length 2.6
  TOP w1.016: R13.1 29.85,50.8 P1.6

## Copper pours and planes (outline as drawn; the poured copper is in the pictures)
GND_SIGNAL on TOP: 31.12,0.25 4.45,0.25 1.61,1.44 0.25,4.19 0.25,51.43 0.25,51.61 1.42,54.4 4.19,55.63 54.36,55.63 60.63,52.89 63.25,46.56 63.25,46.35 63.25,4.19 61.85,1.39 58.93,0.25 31.75,0.25 ; 13 cut-outs
GND_SIGNAL on BOTTOM: 31.12,0.25 4.45,0.25 1.61,1.44 0.25,4.19 0.25,51.43 0.25,51.61 1.42,54.4 4.19,55.63 54.36,55.63 60.63,52.89 63.25,46.56 63.25,46.35 63.25,4.19 61.85,1.39 58.93,0.25 31.75,0.25 ; 10 cut-outs

## Text on the board
BOTTOM: 600-60048-01 REV06 | 600-60048-01 REV06 SECONDARY SIDE
Ref Des/Assembly Bottom: ASSEMBLY DRAWING | CY8C42 FAMILY | Processor Module | 620-60048-01
Board Geometry/Soldermask Bottom: 600-60048-01 REV06 SECONDARY SOLDERMASK
Ref Des/Silkscreen Bottom: PDC-09547 REV 1 SECONDARY SILKSCREEN | 600-60048-01 REV06 SECONDARY SILKSCREEN
User.Comments: 01/29/13 | 01/28/13 | ZMK | RKAD | SEMICONDUCTOR | 2700 162nd St. SW.  BLDG D | Lynnwood, WA  98087 | (425)-787-4466 | 08/31/12 | 09/30/12 | 12/04/12 | 01/08/13 | 05/27/12 | ALPHA RELEASE | ADDED LCD INCRESE BOARD SIZE | REMOVED P3_6 & P3_7 NETS FROM J3. | ROTATED P1. CHANGED BOARDOUTLINE. | NET CHANGED P3_0,P3_2,P3_6,P3_7. | ADDED C12, R14. ADDED SILK. | 02 | 03 | 04 | 05 | 06 | 01 | CYPRESS | C
TOP: 600-60048-01 REV06 PRIMARY SIDE
Ref Des/Assembly Top: 1 OF 2 | ASSEMBLY DRAWING | CY8C42 FAMILY | Processor Module | 620-60048-01
Board Geometry/Soldermask Top: 600-60048-01 REV06 PRIMARY SOLDERMASK
Ref Des/Silkscreen Top: SWDIO | P2_6 | P2_4 | P2_2 | P2_0 | 1 | 2 | GND | XRES | P1_2 | P1_3 | P1_5 | P1_7 | 12 | 3 | 6 | 9 | P4_3 | P0_7 | P0_5 | P0_3 | P0_1 | P4_1 | P1_0 | P1_1 | HWRST | P1_4 | P1_6 | 3V3 | 5V | 31 | 32 | 11 | 44 | 22 | 34 | 33 | 23 | P4_2 | P0_6 | P0_4 | P0_2 | P0_0 | P4_0 | P3_1 | SWDCLK | P3_5 | P3_7 | P2_7 | P2_5 | P3_0 | P2_3 | P2_1 | P3_4 | P3_6 | VSSD | VCC_LCD | ON | CMOD | CSH_TANK | OFF | PIN 1 LCD | VDDD | CY8C42 FAMILY | PROCESSOR MODULE | J1 | J2 | J4 | J3 | PROG | PDC-09547 REV 1 PRIMARY SILKSCREEN | 600-60048-01 REV06 PRIMARY SILKSCREEN
PAGE_OUTLINE: REV | 600-60048-01 REV06 PRIMARY SOLDERPASTE
DIMENSION: 600-60048-01 REV06 SECONDARY SOLDERPASTE | 1. RoHS COMPLIANT CERTIFICATION OR MATERIAL DECLARATION REQUIRED | 2. MATERIAL: | A. IS410 OR EQUIVALENT. MATERIAL MUST CONFORM TO UL94V-0. | B. USE HTE COPPER 1 oz. EXTERNAL LAYERS AND 1 oz. COPPER | 3. DRILLING: | A. DIAMETERS IN DRILL TABLE ARE FINISHED HOLE SIZES +/-.003 TOL. | UNLESS OTHERWISE SPECIFIED IN DRILL TABLE. | B. TEARDROP ALLOWED ON ENTRY OF VIA ON EVERY TRACE LAYER. | 4. PLATING: | COPPER PLATING IN THRU-HOLES .001 min. | 5. MARKING: | A. SILKSCREEN IN WHITE NON-CONDUCTIVE EPOXY INK ON PRIMARY SIDE OF THE | BOARD OR BOTH SIDES IF APPLICABLE. | B. FABRICATOR TO ETCH DATE CODE AND LOGO ON SECONDARY SIDE. | 6. FINAL FABRICATION: | A. SOLDRMASK PRIMARY AND SECONDARY SIDE OF BOARD USING LIQUID PHOTOIMAGABLE | MASK MATERIAL OVER BARE COPPER. PER IPC-SM-840. MASK ARTWORKS PROVIDED | ARE 1:1. SOLDERMASK COLOR **RED** | 7. FINISH: | A. SHALL BE ELECTROLYTIC NICKEL/GOLD. ELECTROLESS NIKEL / IMMERSION GOLD. (ENIG) | B. NICKEL THICKNESS: 100-200 MICROINCHES. | C. GOLD THICKNESS: 3-10 MICROINCHES. | 8. BOARDS SHALL BE PURCHASED FROM UL RECOGNIZED VENDORS ONLY AND SHALL BE | MARKED IN COPPER ON SECONDARY SIDE OF BOARD WITH VENDORS UL IDENT. | FLAMABILITY RATING (94-V0), DATE CODE (WWYY), AND RoHS COMPILANT SYMBOL. | 9. MANUFACTURE BOARD TO BE IN ACCORDANCE WITH PERFORMANCE STANDARD | IPC-6011/6012 CLASS 2 BOARD TO BE INSPECTED PER IPC-600-A CLASS 2. | 10.MAXIMUM WRAP OR TWIST SHALL NOT EXCEED .010 in/in. | C. OVERALL METAL TO METAL THICKNESS AS SPECIFIED IN THE CROSS SECTION | FOIL FOR INTERNAL LAYER 2.  USE 3 oz. COPPER FOR INTERNAL LAYER 3. | 3 PLACES | 1 OF 1 | NOTES:(UNLESS OTHERWISE SPECIFIED) | FABRICATION DRAWING | CY8C42 FAMILY | Processor Module | 610-60046-01
DEVICE_TYPE_TOP: REV | SEMICONDUCTOR | 2700 162nd St. SW.  BLDG D | Lynnwood, WA  98087 | (425)-787-4466 | CYPRESS | 06 | C
User.7: FIGURE | SIZE | 10.0 | 28.0 | 30.0 | 40.0 | 43.0 | 90.0 | DRILL CHART: TOP to BOTTOM | ALL UNITS ARE IN MILS | TOLERANCE | +3.0/-10.0 | +3.0/-3.0 | PLATED | NON-PLATED | QTY | 141 | 128 | 17 | 1 | 15 | 2 | 6
